# Altium PCB PCB3.PcbDoc (part 4 of 4)
Units mm, origin at the board's own origin, x right, y up, seen from the top; angles counter-clockwise.
Board outline 160 x 194 mm, 2 copper layers (Top Layer, Bottom Layer); 456 components, 297 nets, 1240 pads, 521 vias.
Unrouted connection lines stored in the file: 258.
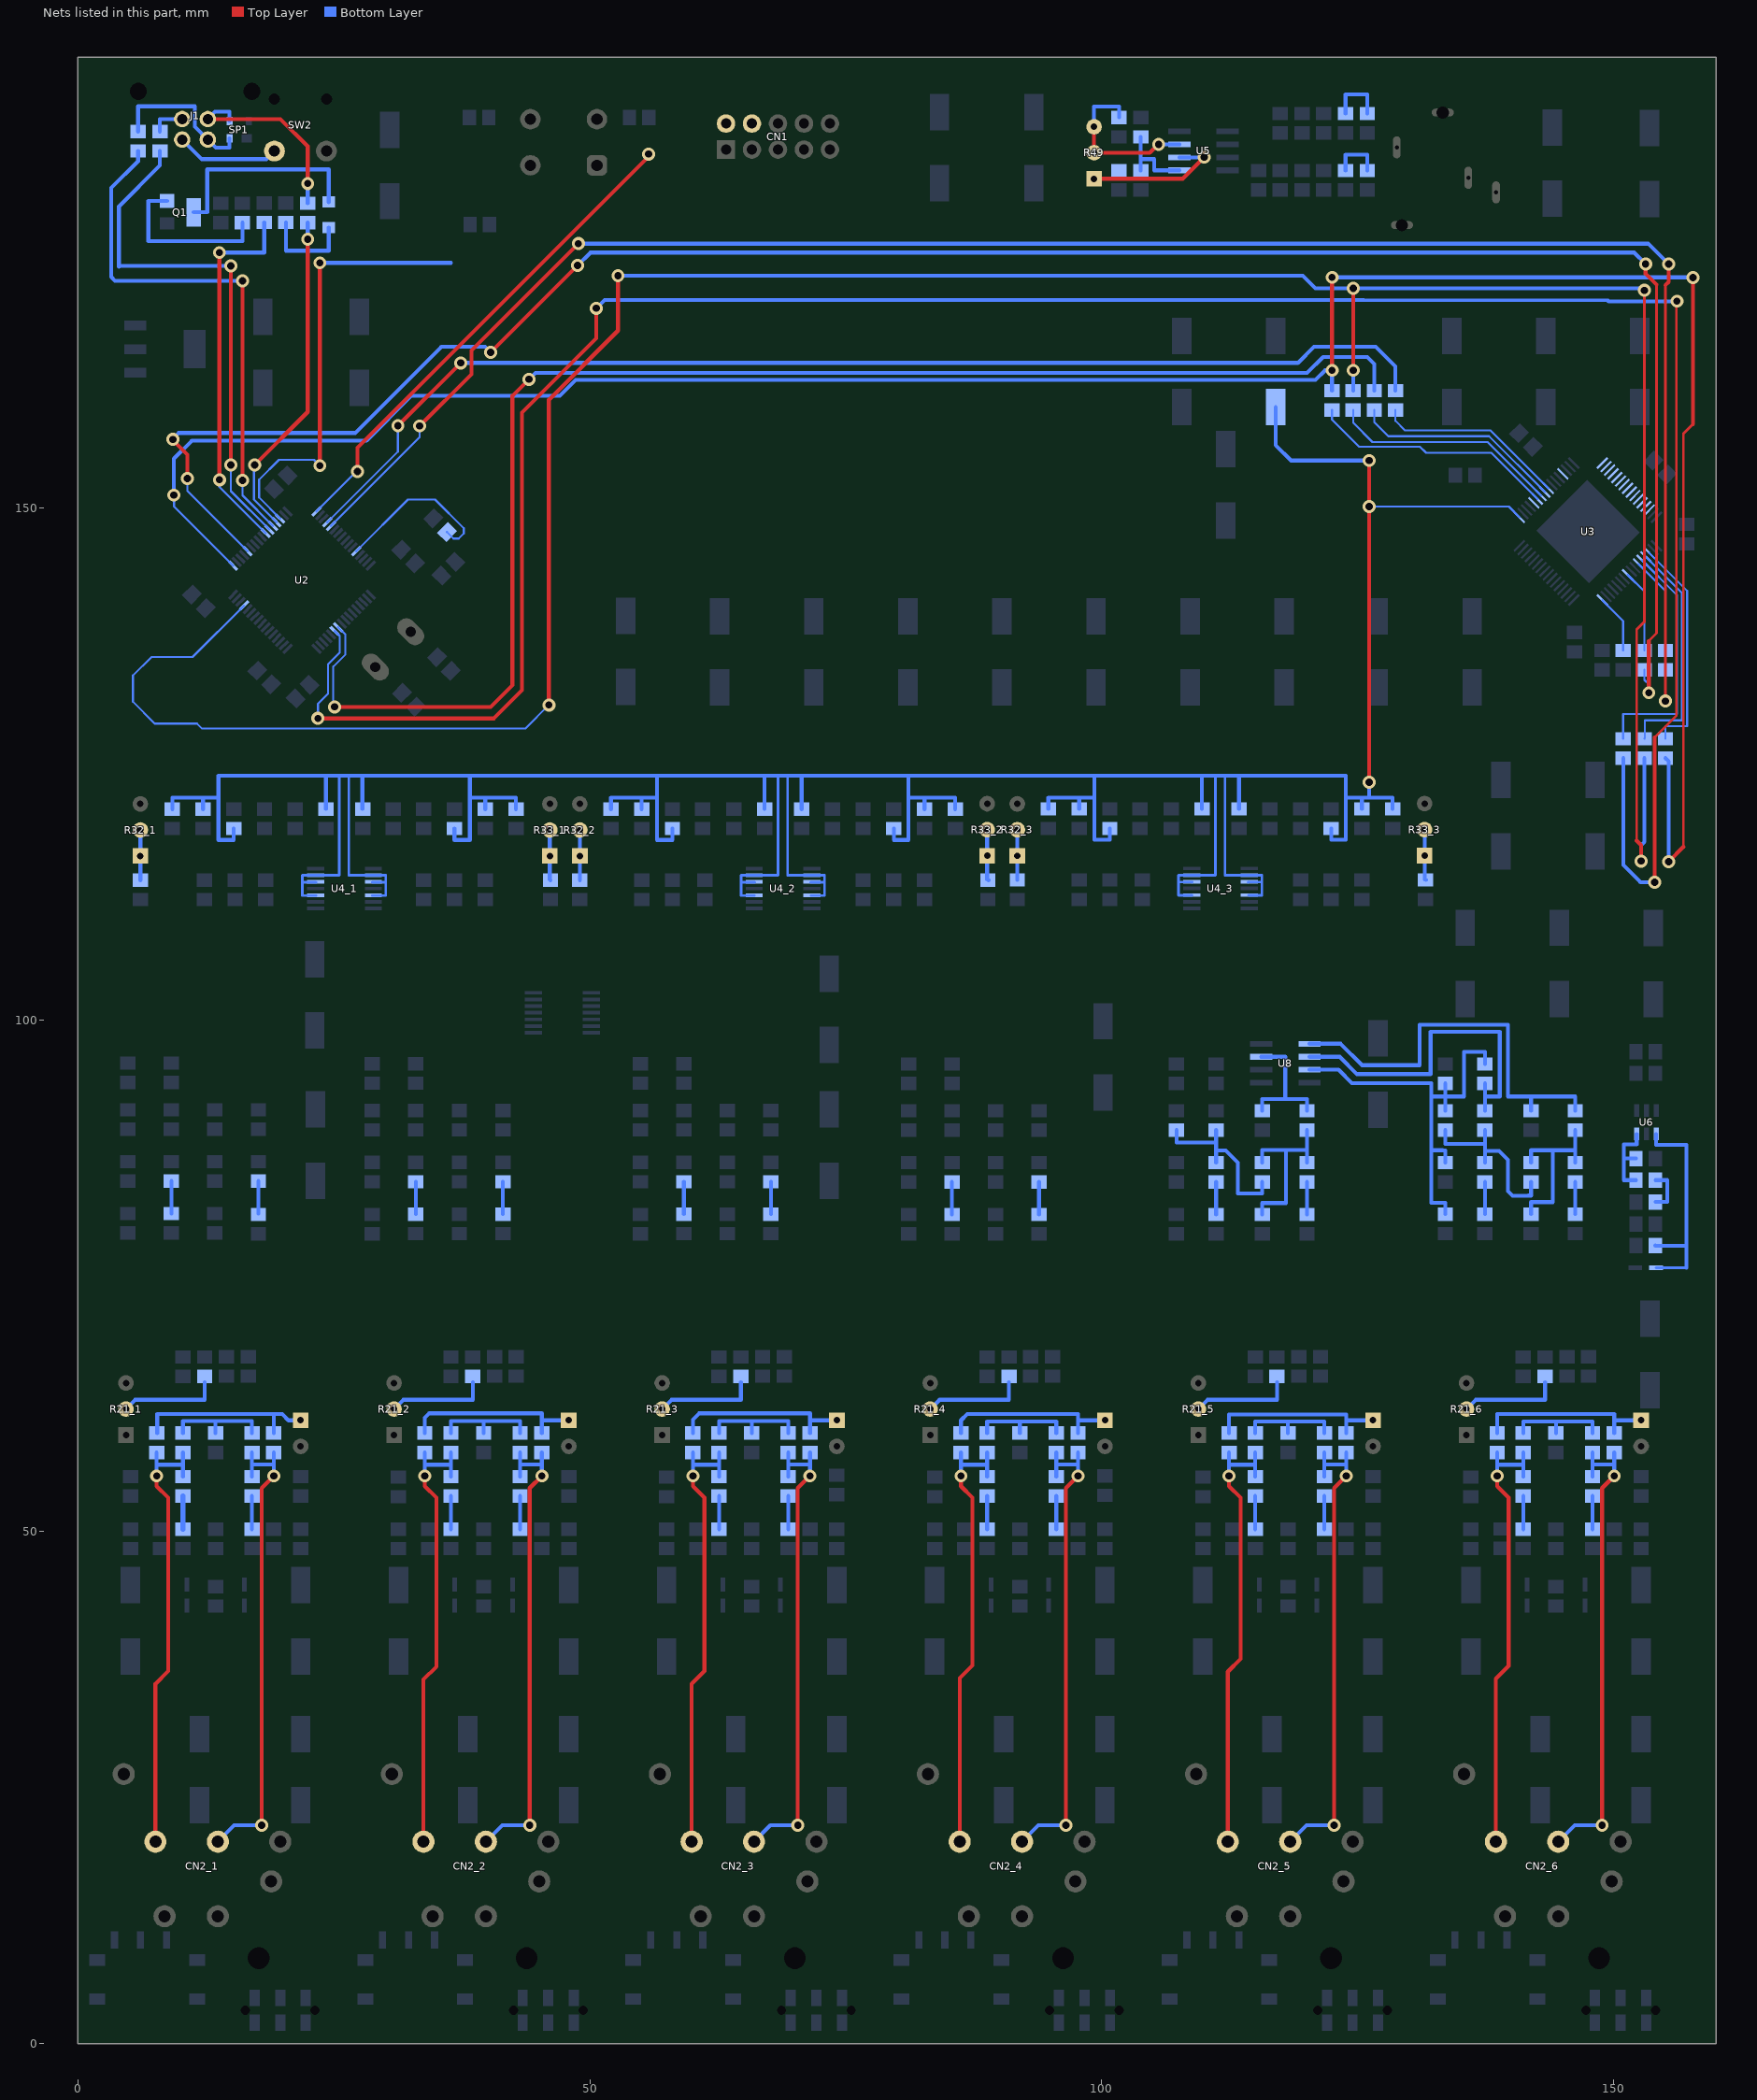
[diagram p4: the nets of this part, all layers, seen from the top]

## Via types
v1: diameter 1.27, hole 0.711, Top Layer to Bottom Layer, 517 vias
v2: diameter 1.4, hole 0.7, Top Layer to Bottom Layer, 4 vias

## Nets (pads, with @x,y where several pads share a name; then routed paths per layer and width w, separated by ;. In a path a pad name is that pad's centre, name@x,y a point inside that pad or via, vN(x,y) a via of type N, cw(c..) or ccw(c..) an arc to the next point about the centre after c; other vN are vias at no path point) (continued)
NetC84_1: C84.1 R122.1 R126.2 R127.1 | length 17.3
  Bottom Layer w0.381: R122.1@107.309,89.212 107.309,88 111.174,88 ; R126.2@111.174,86.05 111.174,87.225 ; R127.1@111.174,89.212 111.174,88 ; C84.1@115.674,84.15 115.674,83.037 113.299,83.037 113.299,86.037 112.111,87.225 111.174,87.225 ; 111.174,87.225 111.174,88
NetC84_2: C84.2 R130.2 R131.1 R132.2 | length 17.4
  Bottom Layer w0.381: R132.2@115.674,80.987 115.674,82.1 117.986,82.1 117.986,87.287 ; C84.2@115.674,86.05 115.674,87.287 117.986,87.287 ; R130.2@120.049,86.05 120.049,87.287 ; R131.1@120.049,89.212 120.049,87.287 ; 117.986,87.287 120.049,87.287
NetC85_1: C85.1 R131.2 U8.3 | length 13.1
  Bottom Layer w0.381: U8.3@115.575,96.385 117.924,96.385 117.924,92.25 ; C85.1@115.674,91.113 115.674,92.25 117.924,92.25 ; R131.2@120.049,91.113 120.049,92.25 117.924,92.25
NetC86_1: C86.1 R133.2 R134.2 R135.1 R139.1 U8.7 | length 42.7
  Bottom Layer w0.381: U8.7@120.3,95.115 123.135,95.115 124.438,93.812 132.188,93.812 132.188,92.5 ; R134.2@133.563,81.012 133.563,82.125 132.188,82.125 132.188,87.25 ; R135.1@133.563,86.05 133.563,87.24 133.299,87.24 133.289,87.25 132.188,87.25 ; R133.2@133.563,91.113 133.562,92.5 ; R139.1@133.563,93.775 133.562,92.5 ; C86.1@137.438,95.675 137.438,96.875 135.375,96.875 135.375,92.5 133.562,92.5 ; 132.188,87.25 132.188,92.5 ; 132.188,92.5 133.562,92.5
NetC86_2: C86.2 R138.2 U8.6 | length 33.8
  Bottom Layer w0.381: U8.6@120.3,96.385 123.24,96.385 124.938,94.687 132.125,94.687 132.125,98.812 138.875,98.812 138.875,92.5 137.438,92.5 ; R138.2@137.438,91.113 137.438,92.5 ; C86.2@137.438,93.775 137.438,92.5
NetC87_1: C87.1 R133.1 R137.2 R138.1 | length 17.8
  Bottom Layer w0.381: R133.1@133.563,89.212 133.563,87.875 137.438,87.875 ; R137.2@137.438,86.05 137.438,87.187 ; R138.1@137.438,89.212 137.438,87.875 ; C87.1@141.938,84.15 141.938,82.822 141.674,82.822 141.664,82.812 140.125,82.812 139.688,83.25 139.688,86.312 138.813,87.187 137.438,87.187 ; 137.438,87.187 137.438,87.875
NetC87_2: C87.2 R141.2 R142.1 R143.2 | length 17
  Bottom Layer w0.381: R143.2@141.938,81.012 141.938,82.187 144.063,82.187 144.063,87.25 ; C87.2@141.938,86.05 141.938,87.25 144.063,87.25 ; R141.2@146.25,86.05 146.25,87.25 ; R142.1@146.25,89.212 146.25,87.25 ; 144.063,87.25 146.25,87.25
NetC88_1: C88.1 R142.2 U8.5 | length 40.5
  Bottom Layer w0.381: U8.5@120.3,97.655 123.345,97.655 125.438,95.562 131.062,95.562 131.062,99.5 139.688,99.5 139.688,92.5 141.938,92.5 ; C88.1@141.938,91.113 141.938,92.5 ; R142.2@146.25,91.113 146.25,92.5 141.938,92.5
NetC89_1_1: C89_1.1 C90_1.1 CN2_1.2 R145_1.2 | length 43.9
  Top Layer w0.381: CN2_1.2@7.564,19.718 7.564,35.126 8.812,36.375 8.812,53.313 7.688,54.438 v1(7.688,55.437)
  Bottom Layer w0.381: v1(7.688,55.437) 7.688,56.542 ; R145_1.2@7.688,57.73 7.688,56.542 ; v1@7.75,55.437 v1@7.75,55.441 ; C89_1.1@10.25,55.38 10.25,56.542 ; C90_1.1@10.25,57.73 10.25,56.542 ; 7.688,56.542 10.25,56.542
NetC89_1_2: C89_1.2 R144_1.2 | length 3.2
  Bottom Layer w0.508: R144_1.2@10.25,50.242 C89_1.2@10.25,53.48
NetC89_2_1: C89_2.1 C90_2.1 CN2_2.2 R145_2.2 | length 43.9
  Top Layer w0.381: CN2_2.2@33.751,19.718 33.751,35.564 35,36.812 35,53.313 33.875,54.438 v1(33.875,55.437)
  Bottom Layer w0.381: v1(33.875,55.437) 33.875,56.542 ; R145_2.2@33.875,57.73 33.875,56.542 ; C89_2.1@36.43,55.38 36.43,56.542 ; C90_2.1@36.43,57.73 36.43,56.542 ; 33.875,56.542 36.43,56.542
NetC89_2_2: C89_2.2 R144_2.2 | length 3.2
  Bottom Layer w0.381: R144_2.2@36.43,50.242 C89_2.2@36.43,53.48
NetC89_3_1: C89_3.1 C90_3.1 CN2_3.2 R145_3.2 | length 43.9
  Top Layer w0.381: CN2_3.2@59.939,19.718 59.939,35.126 61.187,36.375 61.187,53.313 60.062,54.438 v1(60.062,55.437)
  Bottom Layer w0.381: v1(60.062,55.437) 60.062,56.542 ; R145_3.2@60.063,57.73 60.062,56.542 ; C89_3.1@62.617,55.38 62.617,56.542 ; C90_3.1@62.617,57.73 62.617,56.542 ; 60.062,56.542 62.617,56.542
NetC89_3_2: C89_3.2 R144_3.2 | length 3.2
  Bottom Layer w0.381: R144_3.2@62.617,50.242 C89_3.2@62.617,53.48
NetC89_4_1: C89_4.1 C90_4.1 CN2_4.2 R145_4.2 | length 43.9
  Top Layer w0.381: CN2_4.2@86.126,19.718 86.126,35.689 87.375,36.937 87.375,53.313 86.25,54.438 v1(86.25,55.437)
  Bottom Layer w0.381: v1(86.25,55.437) 86.25,56.542 ; R145_4.2@86.25,57.73 86.25,56.542 ; C89_4.1@88.805,55.38 88.805,56.542 ; C90_4.1@88.805,57.73 88.805,56.542 ; 86.25,56.542 88.805,56.542
NetC89_4_2: C89_4.2 R144_4.2 | length 3.2
  Bottom Layer w0.381: R144_4.2@88.805,50.242 C89_4.2@88.805,53.48
NetC89_5_1: C89_5.1 C90_5.1 CN2_5.2 R145_5.2 | length 43.9
  Top Layer w0.381: CN2_5.2@112.314,19.718 112.314,36.314 113.562,37.563 113.562,53.313 112.437,54.438 v1(112.437,55.437)
  Bottom Layer w0.381: v1(112.437,55.437) 112.437,56.542 ; R145_5.2@112.437,57.73 112.437,56.542 ; C89_5.1@114.992,55.38 114.992,56.542 ; C90_5.1@114.992,57.73 114.992,56.542 ; 112.437,56.542 114.992,56.542
NetC89_5_2: C89_5.2 R144_5.2 | length 3.2
  Bottom Layer w0.381: R144_5.2@114.992,50.242 C89_5.2@114.992,53.48
NetC89_6_1: C89_6.1 C90_6.1 CN2_6.2 R145_6.2 | length 44
  Top Layer w0.381: CN2_6.2@138.501,19.718 138.501,35.626 139.75,36.875 139.75,53.313 138.625,54.438 v1(138.625,55.437) v1@138.687,55.375
  Bottom Layer w0.381: v1(138.625,55.437) 138.625,56.542 ; R145_6.2@138.625,57.73 138.625,56.542 ; C89_6.1@141.18,55.38 141.18,56.542 ; C90_6.1@141.18,57.73 141.18,56.542 ; 138.625,56.542 141.18,56.542
NetC89_6_2: C89_6.2 R144_6.2 | length 3.2
  Bottom Layer w0.381: R144_6.2@141.18,50.242 C89_6.2@141.18,53.48
NetC90_1_2: C90_1.2 C91_1.1 C92_1.1 | length 10.3
  Bottom Layer w0.381: C90_1.2@10.25,59.63 10.25,60.812 13.437,60.812 ; C91_1.1@13.437,59.63 13.437,60.812 ; C92_1.1@17,59.63 17,60.812 13.437,60.812
NetC90_2_2: C90_2.2 C91_2.1 C92_2.1 | length 10.3
  Bottom Layer w0.381: C90_2.2@36.43,59.63 36.43,60.812 39.625,60.812 ; C91_2.1@39.625,59.63 39.625,60.812 ; C92_2.1@43.188,59.63 43.188,60.812 39.625,60.812
NetC90_3_2: C90_3.2 C91_3.1 C92_3.1 | length 10.3
  Bottom Layer w0.381: C90_3.2@62.617,59.63 62.617,60.812 65.812,60.812 ; C91_3.1@65.812,59.63 65.812,60.812 ; C92_3.1@69.375,59.63 69.375,60.812 65.812,60.812
NetC90_4_2: C90_4.2 C91_4.1 C92_4.1 | length 10.1
  Bottom Layer w0.381: C90_4.2@88.805,59.63 88.805,60.75 92,60.75 ; C91_4.1@92,59.63 92,60.75 ; C92_4.1@95.563,59.63 95.563,60.75 92,60.75
NetC90_5_2: C90_5.2 C91_5.1 C92_5.1 | length 10.1
  Bottom Layer w0.381: C90_5.2@114.992,59.63 114.992,60.742 115,60.75 118.188,60.75 ; C91_5.1@118.188,59.63 118.188,60.75 ; C92_5.1@121.75,59.63 121.75,60.75 118.188,60.75
NetC90_6_2: C90_6.2 C91_6.1 C92_6.1 | length 10.1
  Bottom Layer w0.381: C90_6.2@141.18,59.63 141.18,60.75 144.375,60.75 ; C91_6.1@144.375,59.63 144.375,60.75 ; C92_6.1@147.938,59.63 147.938,60.75 144.375,60.75
NetC92_1_2: C92_1.2 C93_1.1 CN2_1.3 R146_1.1 | length 46.4
  Top Layer w0.381: v1(17.938,21.312) 17.938,54.25 v1(19.125,55.437)
  Bottom Layer w0.381: CN2_1.3@13.66,19.718 15.255,21.312 v1(17.938,21.312) ; C93_1.1@17,55.38 17,56.555 ; C92_1.2@17,57.73 17,56.555 ; v1@19.125,55.375 v1(19.125,55.437) 19.125,56.555 ; R146_1.1@19.125,57.73 19.125,56.555 ; 17,56.555 19.125,56.555
NetC92_2_2: C92_2.2 C93_2.1 CN2_2.3 R146_2.1 | length 46.4
  Top Layer w0.381: v1(44.125,21.312) 44.125,54.25 v1(45.313,55.437)
  Bottom Layer w0.381: CN2_2.3@39.847,19.718 41.442,21.312 v1(44.125,21.312) ; C93_2.1@43.188,55.38 43.188,56.555 ; C92_2.2@43.188,57.73 43.188,56.555 ; v1@45.313,55.375 v1(45.313,55.437) 45.313,56.555 ; R146_2.1@45.313,57.73 45.313,56.555 ; 43.188,56.555 45.313,56.555
NetC92_3_2: C92_3.2 C93_3.1 CN2_3.3 R146_3.1 | length 46.4
  Top Layer w0.381: v1(70.312,21.312) 70.312,54.25 v1(71.5,55.437)
  Bottom Layer w0.381: CN2_3.3@66.035,19.718 67.63,21.312 v1(70.312,21.312) ; C93_3.1@69.375,55.38 69.375,56.555 ; C92_3.2@69.375,57.73 69.375,56.555 ; v1@71.5,55.375 v1(71.5,55.437) 71.5,56.555 ; R146_3.1@71.5,57.73 71.5,56.555 ; 69.375,56.555 71.5,56.555
NetC92_4_2: C92_4.2 C93_4.1 CN2_4.3 R146_4.1 | length 46.4
  Top Layer w0.381: v1(96.5,21.312) 96.5,54.25 v1(97.688,55.437)
  Bottom Layer w0.381: CN2_4.3@92.222,19.718 93.817,21.312 v1(96.5,21.312) ; C93_4.1@95.563,55.38 95.563,56.555 ; C92_4.2@95.563,57.73 95.563,56.555 ; v1@97.688,55.375 v1(97.688,55.437) 97.688,56.555 ; R146_4.1@97.688,57.73 97.688,56.555 ; 95.563,56.555 97.688,56.555
NetC92_5_2: C92_5.2 C93_5.1 CN2_5.3 R146_5.1 | length 46.4
  Top Layer w0.381: v1(122.687,21.312) 122.687,54.25 v1(123.875,55.437)
  Bottom Layer w0.381: CN2_5.3@118.41,19.718 120.005,21.312 v1(122.687,21.312) ; C93_5.1@121.75,55.38 121.75,56.555 ; C92_5.2@121.75,57.73 121.75,56.555 ; v1@123.875,55.375 v1(123.875,55.437) 123.875,56.555 ; R146_5.1@123.875,57.73 123.875,56.555 ; 121.75,56.555 123.875,56.555
NetC92_6_2: C92_6.2 C93_6.1 CN2_6.3 R146_6.1 | length 46.4
  Top Layer w0.381: v1(148.875,21.312) 148.875,54.25 v1(150.062,55.437)
  Bottom Layer w0.381: CN2_6.3@144.597,19.718 146.192,21.312 v1(148.875,21.312) ; C93_6.1@147.938,55.38 147.937,56.555 ; C92_6.2@147.938,57.73 147.937,56.555 ; v1@150.062,55.375 v1(150.062,55.437) 150.062,56.555 ; R146_6.1@150.063,57.73 150.062,56.555 ; 147.937,56.555 150.062,56.555
NetC93_1_2: C93_1.2 R147_1.2 | length 3.2
  Bottom Layer w0.381: R147_1.2@17,50.242 C93_1.2@17,53.48
NetC93_2_2: C93_2.2 R147_2.2 | length 3.2
  Bottom Layer w0.381: R147_2.2@43.188,50.242 C93_2.2@43.188,53.48
NetC93_3_2: C93_3.2 R147_3.2 | length 3.2
  Bottom Layer w0.381: R147_3.2@69.375,50.242 C93_3.2@69.375,53.48
NetC93_4_2: C93_4.2 R147_4.2 | length 3.2
  Bottom Layer w0.381: R147_4.2@95.563,50.242 C93_4.2@95.563,53.48
NetC93_5_2: C93_5.2 R147_5.2 | length 3.2
  Bottom Layer w0.381: R147_5.2@121.75,50.242 C93_5.2@121.75,53.48
NetC93_6_2: C93_6.2 R147_6.2 | length 3.2
  Bottom Layer w0.381: R147_6.2@147.938,50.242 C93_6.2@147.938,53.48
NetCN1_2: CN1.2 U2.49 | length 48.5
  Top Layer w0.381: v1(27.313,153.562) 27.313,155.875 55.75,184.313 v1(55.75,184.563)
  Bottom Layer w0.203: U2.49@23.291,149.655 27.261,153.625 27.313,153.574 v1(27.313,153.562)
NetCN1_4: CN1.4 U2.46 | length 44.3
  Top Layer w0.381: v1(23.625,154.125) v1(23.625,173.938)
  Bottom Layer w0.203: U2.46@19.756,148.948 17.688,151.016 17.688,152.75 19.625,154.688 23.063,154.688 v1(23.625,154.125)
  Bottom Layer w0.381: v1(23.625,173.938) 36.438,173.938
NetD1_1: D1.1 Q1.3 | length 20.6
  Bottom Layer w0.381: Q1.3@11.3,178.875 12.625,178.875 12.625,183.062 24.5,183.062 D1.1@24.5,179.875
NetD1_2: D1.2 R2.1 | length 9.2
  Bottom Layer w0.381: R2.1@20.31,177.88 20.31,175.125 24.5,175.125 D1.2@24.5,177.375
NetD2_2: D2.2 L1.2 U6.1 | length 22.1
  Bottom Layer w0.254: D2.2@154.159,75.765 157.125,75.765
  Bottom Layer w0.381: L1.2@154.075,77.937 154.092,77.92 157.108,77.92 157.125,77.937 ; U6.1@154.15,88.839 154.15,87.775 157.125,87.775 157.125,77.937 ; 157.125,75.765 157.125,77.937
NetJ1_1: J1.1 SW2.1 | length 10.1
  Bottom Layer w0.381: J1.1@10.175,185.977 12.09,184.062 18.393,184.062 SW2.1@19.188,184.857
NetJ1_2: J1.2 R5.1 SP1.2 | length 15.1
  Bottom Layer w0.381: R5.1@5.875,186.763 5.875,189.222 11.419,189.222 11.419,187.233 J1.2@12.675,185.977 13.465,185.188 14.8,185.188 SP1.2@14.8,186.087
NetJ1_3: J1.3 R6.1 SP1.3 | length 19.7
  Top Layer w0.381: J1.3@12.675,187.978 19.772,187.978 22.438,185.312 v1(22.438,181.688)
  Bottom Layer w0.381: J1.3@12.675,187.978 13.385,188.687 14.8,188.687 SP1.3@14.8,187.788 ; R6.1@22.438,179.763 v1(22.438,181.688)
NetJ1_4: J1.4 R7.1 | length 3.4
  Bottom Layer w0.381: R7.1@8,186.763 8,187.978 J1.4@10.175,187.978
NetQ1_1: Q1.1 R3.1 | length 16.7
  Bottom Layer w0.381: Q1.1@8.7,179.975 6.875,179.975 6.875,176.063 16.062,176.063 R3.1@16.062,177.862
NetR1_2: R1.2 U2.60 | length 16.4
  Bottom Layer w0.203: U2.60@27.18,145.766 32.227,150.812 34.875,150.812 37.687,148 37.687,147.5 37.187,147 36.687,147 R1.2@36.047,147.641
NetR4_2: R4.2 U2.42 | length 36.6
  Top Layer w0.381: v1(13.812,174.937) 13.819,174.931 v1(13.819,152.75)
  Bottom Layer w0.203: v1(13.819,152.75) 13.819,152.056 U2.42@18.342,147.534
  Bottom Layer w0.381: v1(13.812,174.937) 18.187,174.937 R4.2@18.188,177.88
NetR5_2: R5.2 U2.44 | length 51.5
  Top Layer w0.381: v1(16.063,152.688) v1(16.063,172.187)
  Bottom Layer w0.203: v1(16.063,152.688) 16.063,151.227 U2.44@19.049,148.241
  Bottom Layer w0.381: R5.2@5.875,184.863 5.875,183.875 3.25,181.25 3.25,172.562 3.625,172.187 v1(16.063,172.187)
NetR6_2: R6.2 U2.45 | length 33.2
  Top Layer w0.381: v1(17.25,154.187) 22.438,159.375 v1(22.438,176.25)
  Bottom Layer w0.203: v1(17.25,154.187) 17.817,154.187 17.187,153.558 17.187,150.809 U2.45@19.402,148.594
  Bottom Layer w0.381: v1(22.438,176.25) R6.2@22.438,177.862
NetR7_2: R7.2 U2.43 | length 51.3
  Top Layer w0.381: v1(14.938,154.187) v1(14.938,173.625)
  Bottom Layer w0.203: v1(14.938,154.187) 14.938,151.645 U2.43@18.695,147.887
  Bottom Layer w0.381: R7.2@8,184.863 8,183.437 4,179.437 4,173.563 4.125,173.688 4.187,173.625 v1(14.938,173.625)
NetR11_2: R11.2 U3.48 | length 5.8
  Bottom Layer w0.203: U3.48@148.897,140.988 150.937,138.947 R11.2@150.937,136.075
NetR12_1: R12.1 U3.35 | length 21.8
  Bottom Layer w0.203: U3.35@153.493,145.584 157.188,141.889 157.188,128.687 155.062,128.687 R12.1@155.062,127.45
NetR12_2: R12.2 R13.1 U2.33 | length 244.2
  Top Layer w0.254: 156.813,116.875 156.812,157.25 157.75,158.188
  Top Layer w0.381: v1(122.5,163.437) v1(122.5,172.517) ; v1(155.375,115.438) 156.813,116.875 ; 157.75,158.188 v1(157.75,172.5)
  Bottom Layer w0.203: v1(9.375,151.25) 9.375,150.136 U2.33@15.16,144.352
  Bottom Layer w0.381: v1(9.375,151.25) 9.375,154.812 11.125,156.563 28.188,156.563 32.563,160.937 47.062,160.937 48.625,162.5 120.875,162.5 121.812,163.437 v1(122.5,163.437) R13.1@122.5,161.45 ; v1(122.5,172.517) v1@157.75,172.517 ; R12.2@155.062,125.55 155.375,125.238 v1(155.375,115.438)
NetR13_2: R13.2 U3.6 | length 24.2
  Bottom Layer w0.203: R13.2@122.5,159.55 122.5,158.625 125.145,155.98 131.082,155.98 131.687,155.375 138.045,155.375 U3.6@142.568,150.852
NetR14_1: R14.1 U3.36 | length 22.9
  Bottom Layer w0.203: R14.1@153,127.45 153.063,127.513 153.063,129.25 156.687,129.25 156.687,141.682 U3.36@153.139,145.23
NetR14_2: R14.2 R15.1 U2.29 | length 280.8
  Top Layer w0.254: 152.25,117.5 152.25,138.125 153,138.875 v1(153,171.25)
  Top Layer w0.381: v1(46,130.75) 46,160.562 52.75,167.313 v1(52.75,172.688) ; v1(124.562,163.437) v1(124.562,171.438) ; 152.25,117.5 152.688,117.063 v1(152.688,115.5)
  Bottom Layer w0.203: U2.29@16.22,140.463 11.195,135.437 7.187,135.437 5.375,133.625 5.375,131.062 7.5,128.937 11.625,128.937 12.125,128.437 43.687,128.438 v1(46,130.75)
  Bottom Layer w0.381: v1(52.75,172.688) 119.625,172.688 120.875,171.438 v1(124.562,171.438) v1@153,171.438 ; R15.1@124.562,161.45 v1(124.562,163.437) ; v1(152.688,115.5) 152.688,117.062 153,117.375 R14.2@153,125.55
NetR15_2: R15.2 U3.7 | length 22.5
  Bottom Layer w0.203: R15.2@124.562,159.55 124.562,158.313 126.437,156.438 137.689,156.438 U3.7@142.921,151.205
NetR16_1: R16.1 U3.41 | length 8.1
  Bottom Layer w0.203: U3.41@151.371,143.463 153,141.834 R16.1@153,136.075
NetR16_2: R16.2 U2.37 | length 211.4
  Top Layer w0.254: 153.423,136.986 154.187,137.75 154.187,171.813
  Top Layer w0.381: v1(9.275,156.687) 9.275,156.6 10.687,155.188 v1(10.687,152.875) ; v1(40.313,165.188) v1(48.813,173.688) ; v1(153.125,173.812) 153.125,172.875 154.187,171.813 ; v1@153.423,132.173 v1@153.438,132.188 ; 153.423,136.986 153.438,136.972 v1@153.438,132.188 ; v1(153.438,131.938) v1@153.438,132.188
  Bottom Layer w0.203: v1(10.687,152.875) 10.687,151.652 U2.37@16.574,145.766 ; R16.2@153,134.175 153,133.188 153.438,132.75 v1(153.438,131.938)
  Bottom Layer w0.381: v1(9.275,156.687) 9.275,156.775 9.813,157.312 27.062,157.312 35.5,165.75 39.75,165.75 v1(40.313,165.188) ; v1(48.813,173.688) 50.062,174.937 152,174.937 v1(153.125,173.812)
NetR17_1: R17.1 U2.10 | length 143.8
  Top Layer w0.381: v1(25.063,130.562) 40.313,130.562 42.437,132.687 42.437,160.937 v1(44.063,162.562)
  Bottom Layer w0.203: v1(25.063,130.562) 24.937,130.688 24.937,134.5 26.125,135.688 26.125,137.629 U2.10@25.413,138.341
  Bottom Layer w0.381: v1(44.063,162.562) 44.688,163.187 120.062,163.187 121.625,164.75 125.938,164.75 126.625,164.063 R17.1@126.625,161.45
NetR17_2: R17.2 U3.8 | length 20.6
  Bottom Layer w0.203: R17.2@126.625,159.55 126.625,158.375 128,157 137.834,157 U3.8@143.275,151.559
NetR18_1: R18.1 U3.37 | length 24.1
  Bottom Layer w0.203: R18.1@150.937,127.45 150.937,129.875 156.188,129.875 156.188,141.475 U3.37@152.786,144.877
NetR18_2: R18.2 U2.11 | length 248.8
  Top Layer w0.254: 154,127.575 156.142,129.717 v1@156.142,170.188
  Top Layer w0.381: v1(23.437,129.438) 40.625,129.438 43.375,132.188 43.375,159.313 50.625,166.562 v1(50.625,169.5) ; v1(154,113.437) 154,127.575
  Bottom Layer w0.203: v1(23.437,129.438) 23.437,130.875 24.438,131.875 24.438,134.75 25.562,135.875 25.562,137.484 U2.11@25.059,137.988
  Bottom Layer w0.381: v1(50.625,169.5) 51.437,170.312 105.687,170.312 125.562,170.312 149.437,170.25 149.517,170.171 156.171,170.171 v1(156.188,170.188) ; R18.2@150.937,125.55 150.937,115.125 152.625,113.437 v1(154,113.437)
NetR19_1: R19.1 U2.52 | length 116.1
  Top Layer w0.381: v1(31.25,158.034) v1(37.375,164.159)
  Bottom Layer w0.203: U2.52@24.352,148.594 31.25,155.492 v1(31.25,158.034)
  Bottom Layer w0.381: v1(37.375,164.159) 119.159,164.159 120.75,165.75 126.75,165.75 128.687,163.813 R19.1@128.687,161.45
NetR19_2: R19.2 U3.9 | length 18.7
  Bottom Layer w0.203: R19.2@128.687,159.55 128.687,158.5 129.625,157.562 137.979,157.562 U3.9@143.629,151.912
NetR20_1: R20.1 U3.38 | length 9.5
  Bottom Layer w0.203: U3.38@152.432,144.523 155.062,141.893 R20.1@155.062,136.075
NetR20_2: R20.2 U2.53 | length 190.7
  Top Layer w0.254: v1(155.062,131.125) 155.062,171.75
  Top Layer w0.381: v1(33.375,158) 38.437,163.062 38.437,165.375 v1(48.875,175.813) ; 155.062,171.75 155.375,172.063 v1@155.375,173.75
  Bottom Layer w0.203: U2.53@24.706,148.241 33.375,156.91 v1(33.375,158) ; v1(155.062,131.125) R20.2@155.062,134.175
  Bottom Layer w0.381: v1(48.875,175.813) 153.375,175.813 v1(155.375,173.812)
NetR21_1_2: R21_1.2 R23_1.1 | length 9.8
  Bottom Layer w0.381: R21_1.2@4.687,61.978 5.585,62.875 12.375,62.875 R23_1.1@12.375,64.59
NetR21_2_2: R21_2.2 R23_2.1 | length 9.8
  Bottom Layer w0.381: R21_2.2@30.875,61.978 31.772,62.875 38.563,62.875 R23_2.1@38.563,64.59
NetR21_3_2: R21_3.2 R23_3.1 | length 9.8
  Bottom Layer w0.381: R21_3.2@57.062,61.978 57.96,62.875 64.75,62.875 R23_3.1@64.75,64.59
NetR21_4_2: R21_4.2 R23_4.1 | length 9.8
  Bottom Layer w0.381: R21_4.2@83.25,61.978 84.147,62.875 90.938,62.875 R23_4.1@90.938,64.59
NetR21_5_2: R21_5.2 R23_5.1 | length 9.8
  Bottom Layer w0.381: R21_5.2@109.437,61.978 110.335,62.875 117.125,62.875 R23_5.1@117.125,64.59
NetR21_6_2: R21_6.2 R23_6.1 | length 9.8
  Bottom Layer w0.381: R21_6.2@135.625,61.978 136.522,62.875 143.312,62.875 R23_6.1@143.312,64.59
NetR32_1_1: R32_1.1 R32_1.2 R34_1.2 | length 4.9
  Bottom Layer w0.381: R34_1.2@6.091,113.637 R32_1.1@6.091,116 R32_1.2@6.091,118.54
NetR32_2_1: R32_2.1 R32_2.2 R34_2.2 | length 4.9
  Bottom Layer w0.381: R34_2.2@49.021,113.637 R32_2.1@49.021,116 R32_2.2@49.021,118.54
NetR32_3_1: R32_3.1 R32_3.2 R34_3.2 | length 4.9
  Bottom Layer w0.381: R34_3.2@91.75,113.65 R32_3.1@91.75,116.012 R32_3.2@91.75,118.552
NetR33_1_1: R33_1.1 R33_1.2 R35_1.2 | length 4.9
  Bottom Layer w0.381: R33_1.2@46.091,118.54 R33_1.1@46.091,116 46.091,113.7 R35_1.2@46.153,113.637
NetR33_2_1: R33_2.1 R33_2.2 R35_2.2 | length 5
  Bottom Layer w0.381: R35_2.2@88.812,113.7 R33_2.1@88.812,116.023 R33_2.2@88.812,118.563 ; R35_2.2@88.875,113.7 R35_2.2@88.938,113.637
NetR33_3_1: R33_3.1 R33_3.2 R35_3.2 | length 5
  Bottom Layer w0.381: R35_3.2@131.541,113.713 R33_3.1@131.541,116.035 R33_3.2@131.541,118.575 ; R35_3.2@131.604,113.713 R35_3.2@131.666,113.65
NetR39_2: R39.2 R40.1 | length 5.9
  Bottom Layer w0.381: R40.1@123.812,188.512 123.812,190.39 125.937,190.39 R39.2@125.937,188.512
NetR42_2: R42.2 R47.2 U5.5 | length 8.1
  Bottom Layer w0.381: R47.2@103.812,182.95 103.812,184.062 ; R42.2@103.812,186.237 103.812,184.062 ; U5.5@107.575,182.97 105.125,182.97 105.125,184.062 103.812,184.062
NetR43_2: R43.2 R44.1 | length 5.2
  Bottom Layer w0.381: R44.1@123.812,182.95 123.812,184.5 125.937,184.5 R43.2@125.937,182.95
NetR46_1: R46.1 R49.2 R49.3 U5.7 | length 17
  Top Layer w0.381: R49.3@99.25,187.227 R49.2@99.25,184.687 104.689,184.687 105.499,185.498 v1@105.123,185.498
  Bottom Layer w0.381: R49.3@99.25,187.227 99.25,189.187 101.687,189.187 R46.1@101.687,188.137 ; v1@105.512,185.51 105.512,185.498 v1(105.562,185.498) 107.563,185.498 U5.7@107.575,185.51
NetR49_1: R49.1 R50.2 U5.6 | length 14
  Top Layer w0.381: R49.1@99.25,182.147 107.897,182.147 v1(110,184.25)
  Bottom Layer w0.381: U5.6@107.575,184.24 109.99,184.24 v1(110,184.25)
NetR75_1: R75.1 R76.2 U6.3 | length 8.1
  Bottom Layer w0.381: R76.2@152.187,84.327 151,84.327 151,86.449 ; R75.1@152.187,86.449 151,86.449 ; U6.3@152.25,88.839 152.25,87.812 151,87.812 151,86.449
NetR76_1: R76.1 R77.2 | length 4.5
  Bottom Layer w0.381: R77.2@154.087,82.202 155.25,82.202 155.25,84.327 R76.1@154.087,84.327
NetR81_2: R81.2 R82.1 | length 3.2
  Bottom Layer w0.381: R81.2@9.125,81.075 R82.1@9.125,84.237
NetR85_2: R85.2 R86.1 | length 3.2
  Bottom Layer w0.381: R85.2@17.625,81.075 R86.1@17.625,84.237
NetR92_2: R92.2 R93.1 | length 3.2
  Bottom Layer w0.381: R92.2@33,81.012 R93.1@33,84.175
NetR97_2: R97.2 R98.1 | length 3.2
  Bottom Layer w0.381: R97.2@41.5,81.012 R98.1@41.5,84.175
NetR103_2: R103.2 R104.1 | length 3.2
  Bottom Layer w0.381: R103.2@59.188,81.012 R104.1@59.188,84.175
NetR107_2: R107.2 R108.1 | length 3.2
  Bottom Layer w0.381: R107.2@67.687,81.012 R108.1@67.687,84.175
NetR114_2: R114.2 R115.1 | length 3.2
  Bottom Layer w0.381: R114.2@85.375,80.987 R115.1@85.375,84.15
NetR118_2: R118.2 R119.1 | length 3.2
  Bottom Layer w0.381: R118.2@93.875,80.987 R119.1@93.875,84.15
NetR125_2: R125.2 R126.1 | length 3.2
  Bottom Layer w0.381: R125.2@111.174,80.987 R126.1@111.174,84.15
NetR129_2: R129.2 R130.1 | length 3.2
  Bottom Layer w0.381: R129.2@120.049,80.987 R130.1@120.049,84.15
NetR136_2: R136.2 R137.1 | length 3.1
  Bottom Layer w0.381: R136.2@137.438,81.012 R137.1@137.438,84.15
NetR140_2: R140.2 R141.1 | length 3.1
  Bottom Layer w0.381: R140.2@146.25,81.012 R141.1@146.25,84.15
NetR145_1_1: R145_1.1 R146_1.2 SW5_1.1 | length 18
  Bottom Layer w0.381: R145_1.1@7.75,59.63 7.75,61.5 19.125,61.5 ; R146_1.2@19.125,59.63 19.125,61.5 ; SW5_1.1@21.75,60.875 20.563,60.875 19.938,61.5 19.125,61.5
NetR145_2_1: R145_2.1 R146_2.2 SW5_2.1 | length 17.7
  Bottom Layer w0.381: R145_2.1@33.875,59.63 33.875,61.125 34.303,61.553 43.076,61.553 43.086,61.563 45.313,61.563 45.313,60.875 ; R146_2.2@45.313,59.63 45.313,60.875 ; SW5_2.1@47.937,60.875 45.313,60.875
NetR145_3_1: R145_3.1 R146_3.2 SW5_3.1 | length 17.6
  Bottom Layer w0.381: R145_3.1@60.063,59.63 60.063,60.938 60.678,61.553 69.263,61.553 69.273,61.563 71.5,61.563 71.5,60.875 ; R146_3.2@71.5,59.63 71.5,60.875 ; SW5_3.1@74.125,60.875 71.5,60.875
NetR145_4_1: R145_4.1 R146_4.2 SW5_4.1 | length 17.4
  Bottom Layer w0.381: R145_4.1@86.25,59.63 86.25,60.875 86.875,61.5 97.688,61.5 97.688,60.875 ; R146_4.2@97.688,59.63 97.688,60.875 ; SW5_4.1@100.312,60.875 97.688,60.875
NetR145_5_1: R145_5.1 R146_5.2 SW5_5.1 | length 17.7
  Bottom Layer w0.381: R145_5.1@112.437,59.63 112.437,61.437 123.875,61.437 123.875,60.875 ; R146_5.2@123.875,59.63 123.875,60.875 ; SW5_5.1@126.5,60.875 123.875,60.875
NetR145_6_1: R145_6.1 R146_6.2 SW5_6.1 | length 17.8
  Bottom Layer w0.381: R145_6.1@138.625,59.63 138.625,61.5 150.063,61.5 150.063,60.875 ; R146_6.2@150.063,59.63 150.063,60.875 ; SW5_6.1@152.688,60.875 150.063,60.875
NetU3_5: U3.5
NetU3_13: U3.13
NetU3_17: U3.17
NetU3_18: U3.18
NetU3_19: U3.19
NetU3_20: U3.20
NetU3_21: U3.21
NetU3_22: U3.22
NetU3_23: U3.23
NetU3_24: U3.24
NetU3_25: U3.25
NetU3_26: U3.26
NetU3_27: U3.27
NetU3_28: U3.28
NetU3_29: U3.29
NetU3_30: U3.30
VCOMAD: C31.1 C51_1.2 C51_2.2 C51_3.2 C52_1.2 C52_2.2 C52_3.2 C59_1.1 C59_2.1 C59_3.1 C60_1.1 C60_2.1 C60_3.1 R24_1.1 R24_2.1 R24_3.1 R25_1.1 R25_2.1 R25_3.1 R28_1.2 R28_2.2 R28_3.2 R29_1.2 R29_2.2 R29_3.2 U3.1 U4_1.3 U4_1.5 U4_1.6 U4_1.9 U4_1.10 U4_1.12 U4_2.3 U4_2.5 U4_2.6 U4_2.9 U4_2.10 U4_2.12 U4_3.3 U4_3.5 U4_3.6 U4_3.9 U4_3.10 U4_3.12 | length 392.4
  Top Layer w0.381: v1(126.125,123.187) 126.123,123.189 126.125,123.191 v1(126.125,150.125) v1(126.125,154.625)
  Bottom Layer w0.203: v1(126.125,150.125) 139.759,150.125 U3.1@140.8,149.084
  Bottom Layer w0.254: U4_1.3@23.234,112.137 21.927,112.137 21.927,113.475 ; U4_1.5@23.259,113.412 23.234,113.437 21.965,113.437 21.927,113.475 ; 25.528,114.112 U4_1.6@23.209,114.112 21.927,114.112 21.927,113.475 ; 25.528,114.125 25.528,123.825 ; 26.466,114.112 30.067,114.112 30.067,113.475 ; 26.466,114.125 26.466,123.825 ; U4_1.10@28.735,113.412 28.76,113.437 30.03,113.437 30.067,113.475 ; U4_1.12@28.76,112.137 30.067,112.137 30.067,113.475 ; U4_2.3@66.081,112.138 64.774,112.138 64.774,113.475 ; U4_2.5@66.106,113.413 66.081,113.438 64.811,113.438 64.774,113.475 ; 68.375,114.113 64.774,114.113 64.774,113.475 ; 68.375,114.125 68.375,123.825 ; 69.313,114.113 72.914,114.113 72.914,113.475 ; 69.312,114.125 69.312,123.825 ; U4_2.10@71.582,113.413 71.607,113.438 72.876,113.438 72.914,113.475 ; U4_2.12@71.607,112.138 72.914,112.138 72.914,113.475 ; U4_3.3@108.809,112.15 107.502,112.15 107.502,113.488 ; U4_3.5@108.834,113.425 108.809,113.45 107.54,113.45 107.502,113.488 ; 111.104,114.125 107.502,114.125 107.502,113.488 ; 111.104,114.138 111.104,123.838 ; 112.041,114.125 115.642,114.125 115.642,113.488 ; 112.041,114.138 112.041,123.838 ; U4_3.10@114.31,113.425 114.335,113.45 115.605,113.45 115.642,113.488 ; U4_3.12@114.335,112.15 115.642,112.15 115.642,113.488
  Bottom Layer w0.381: R28_1.2@9.216,120.575 9.216,121.687 12.216,121.687 ; C51_1.2@12.216,120.575 12.216,121.687 ; 13.716,121.7 13.716,123.825 24.216,123.825 ; R24_1.1@15.216,118.675 15.216,117.562 13.716,117.562 13.716,121.687 12.216,121.687 ; C59_1.1@24.216,120.587 24.216,123.825 ; C60_1.1@27.778,120.588 27.778,123.825 ; R25_1.1@36.778,118.675 36.778,117.562 38.278,117.562 38.278,121.687 39.778,121.687 ; 38.278,121.7 38.278,123.825 ; C52_1.2@39.778,120.575 39.778,121.687 ; R29_1.2@42.778,120.575 42.778,121.687 39.778,121.687 ; R28_2.2@52.063,120.575 52.063,121.688 55.062,121.688 ; C51_2.2@55.063,120.575 55.062,121.688 ; 56.562,121.7 56.562,123.825 ; R24_2.1@58.063,118.675 58.063,117.563 56.563,117.563 56.563,121.688 55.062,121.688 ; C59_2.1@67.063,120.588 67.063,123.825 ; C60_2.1@70.688,120.575 70.688,123.763 70.625,123.825 ; R25_2.1@79.688,118.675 79.688,117.563 81.125,117.563 81.125,121.688 82.625,121.688 ; 81.125,121.7 81.125,123.825 ; C52_2.2@82.688,120.575 82.688,121.625 82.625,121.688 ; R29_2.2@85.688,120.575 85.688,121.688 82.625,121.688 ; R28_3.2@94.791,120.588 94.791,121.7 97.791,121.7 ; C51_3.2@97.791,120.588 97.791,121.7 ; 99.291,121.713 99.291,123.838 ; R24_3.1@100.791,118.688 100.791,117.575 99.291,117.575 99.291,121.7 97.791,121.7 ; C59_3.1@109.791,120.6 109.791,123.838 ; C60_3.1@113.416,120.588 113.416,123.775 113.353,123.838 ; C31.1@117,159.833 117,156.125 118.5,154.625 v1(126.125,154.625) ; R25_3.1@122.416,118.688 122.416,117.575 123.854,117.575 123.854,121.7 125.354,121.7 ; 123.854,121.713 123.854,123.838 113.353,123.838 ; C52_3.2@125.416,120.588 125.416,121.638 125.354,121.7 ; v1(126.125,123.187) 126.125,121.7 ; R29_3.2@128.416,120.588 128.416,121.7 126.125,121.7 ; 24.216,123.825 25.528,123.825 26.466,123.825 27.778,123.825 ; 27.778,123.825 38.278,123.825 ; 38.278,123.825 56.562,123.825 ; 56.562,123.825 67.063,123.825 ; 67.063,123.825 68.375,123.825 69.312,123.825 70.625,123.825 ; 70.625,123.825 81.125,123.825 ; 81.125,123.825 99.278,123.825 99.291,123.838 ; 99.291,123.838 109.791,123.838 ; 109.791,123.838 111.104,123.838 112.041,123.838 113.353,123.838 ; 125.354,121.7 126.125,121.7
pads on no net: CN1.3 CN2_1.Mount CN2_2.Mount CN2_3.Mount CN2_4.Mount CN2_5.Mount CN2_6.Mount CN3.3 CN3.4 SW2.3 SW2.4 SW3_1.7 SW3_1.8 SW3_2.7 SW3_2.8 SW3_3.7 SW3_3.8 SW3_4.7 SW3_4.8 SW3_5.7 SW3_5.8 SW3_6.7 SW3_6.8 SW4_1.1 SW4_1.4 SW4_1.5 SW4_1.6 SW4_1.7 SW4_2.1 SW4_2.4 SW4_2.5 SW4_2.6 SW4_2.7 SW4_3.1 SW4_3.4 SW4_3.5 SW4_3.6 SW4_3.7 SW4_4.1 SW4_4.4 SW4_4.5 SW4_4.6 SW4_4.7 SW4_5.1 SW4_5.4 SW4_5.5 SW4_5.6 SW4_5.7 SW4_6.1 SW4_6.4 SW4_6.5 SW4_6.6 SW4_6.7 U1.2 U2.2 U2.3 U2.4 U2.8 U2.9 U2.14 U2.15 U2.16 U2.17 U2.20 U2.21 U2.28 U2.34 U2.35 U2.36 U2.38 U2.39 U2.40 U2.41 U2.50 U2.51 U2.61 U2.62 U3.10

## Other copper
Top Layer:
  region net NetC17_5_1: 111.063,66.562
Bottom Layer:
  region net 5V: 150.313,92.937
  region net NetC50_1_1: 153.125,95.515

## Silkscreen, mask and mechanical layers (free items; w line width, h text height)
Mechanical 1:
  lines w0.127: 0,0 160,0 160,194 0,194 0,100 0,0 ; 0.5,0.5 159.5,0.5 159.5,193.5 0.5,193.5 0.5,99.5 0.5,0.5